# EAGLE board Pedometer_sch_v3 (EAGLE 9.6.2)
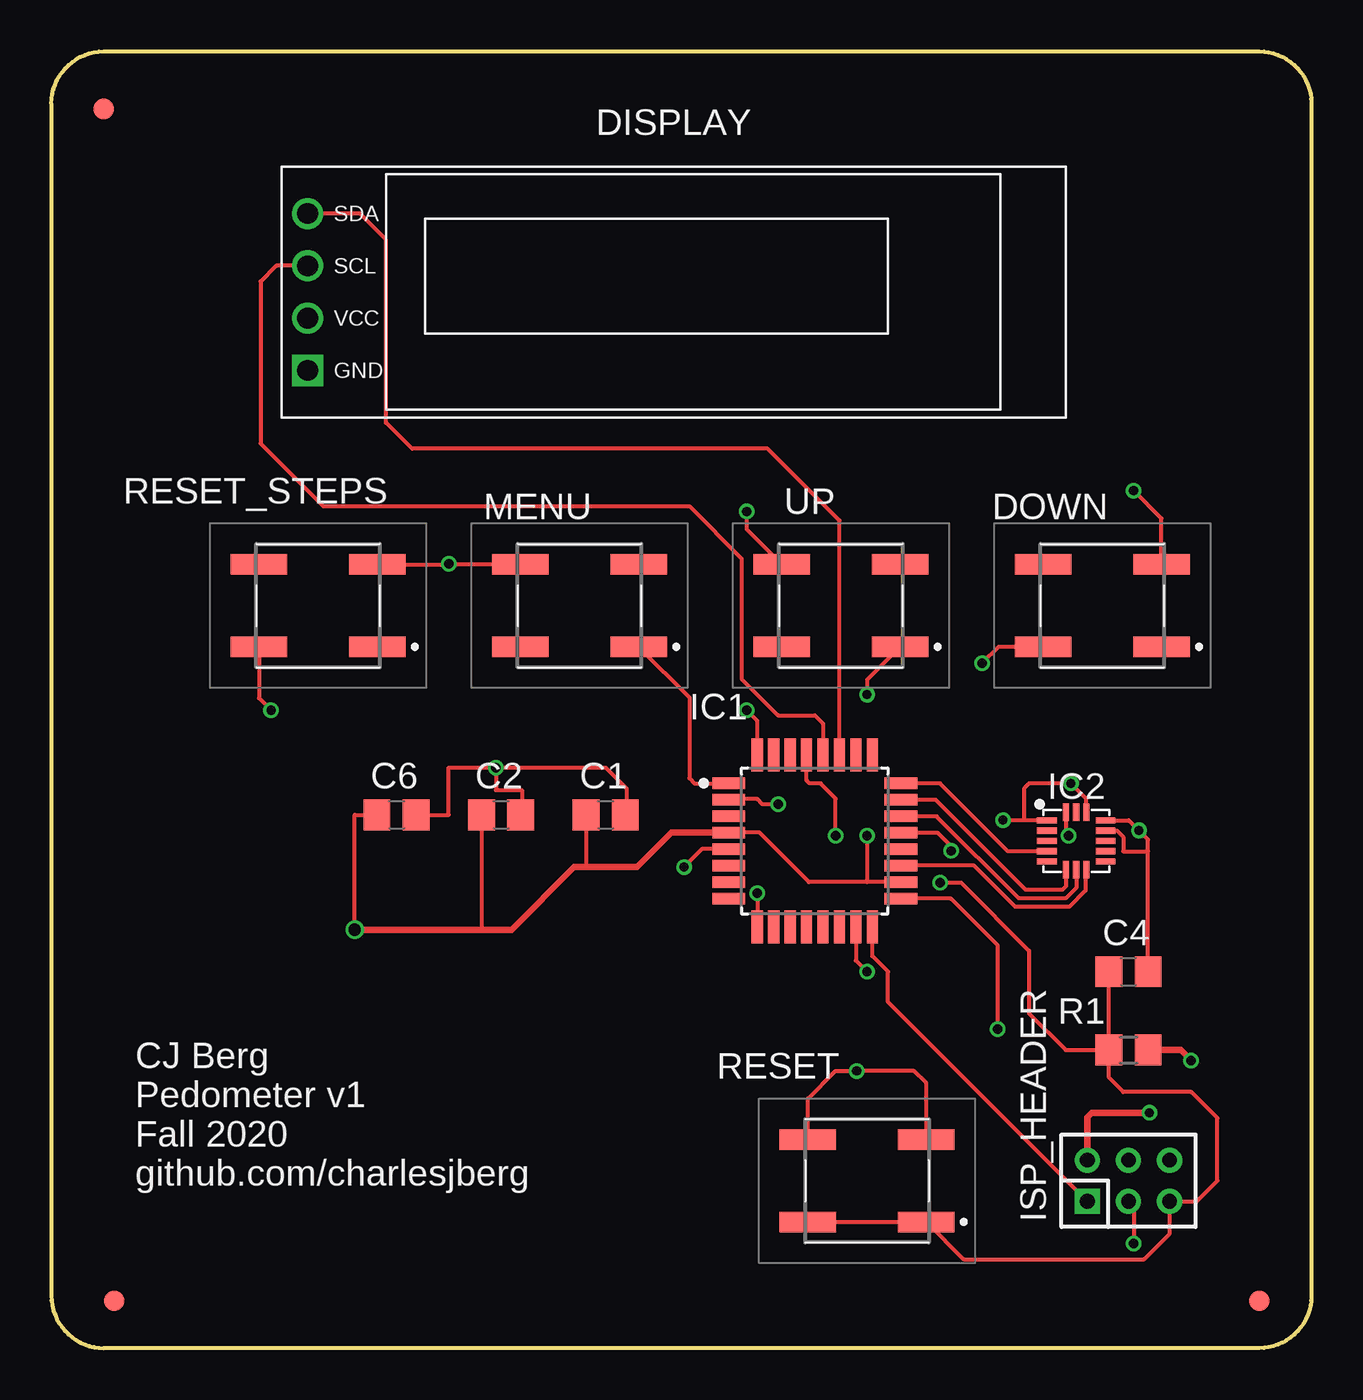
[diagram p0: board, top side]
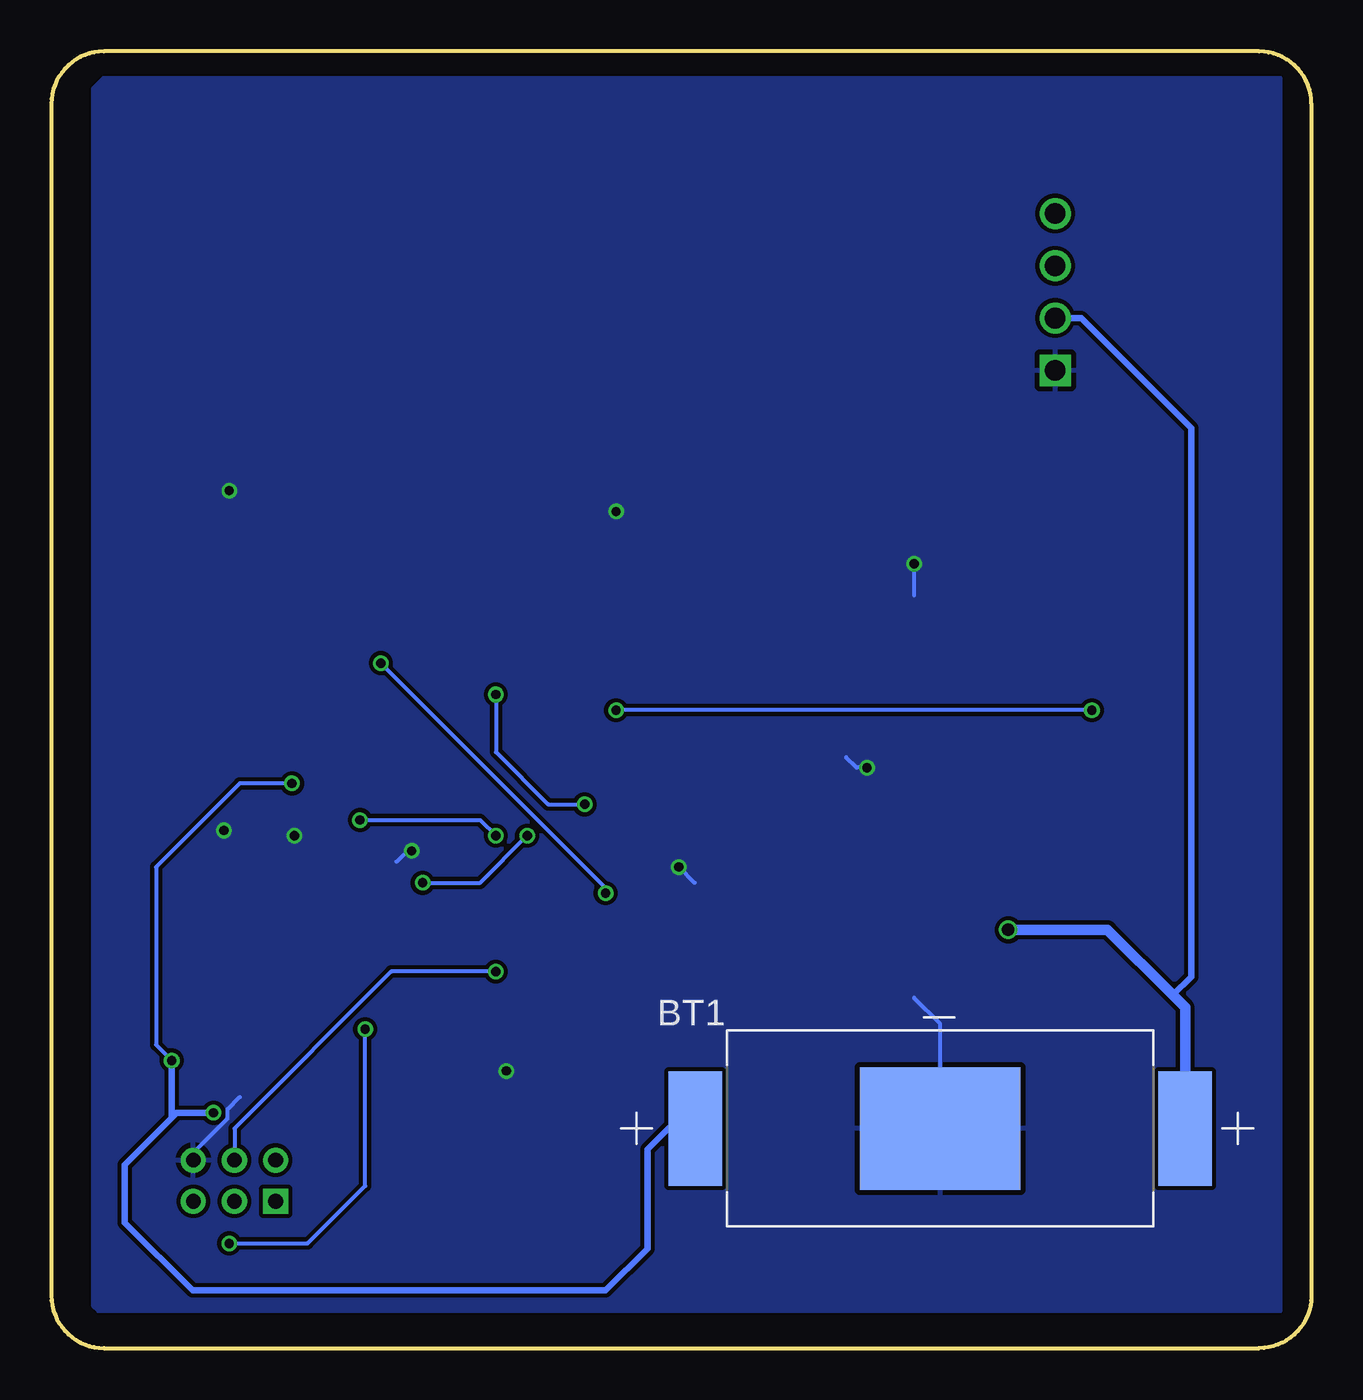
[diagram p1: board, bottom side, seen from below]

Size 61.21 x 62.99 mm. Coordinates in mm from the lower left corner, seen from the top.
Outline: 0,60.45 arc-90 2.54,62.99 58.67,62.99 arc-90 61.21,60.45 61.21,2.54 arc-90 58.67,0 2.54,0 arc-90 0,2.54 0,60.45
Copper layers (1*16): Top 0.035mm / dielectric 1.5mm / Bottom 0.035mm
Design rules "Dirty8TS": minimum track width 8mil, minimum drill 15mil, track to track 8mil, track to pad 8mil, pad to pad 8mil, via to via 8mil, smd to smd 0mil, copper to edge 10mil, drill to drill 10mil, minimum pad ring 10mil, minimum via ring 6mil, stop-mask expansion 2mil, vias tented up to drill 25mil, thermal gap 10mil

## Footprints (pad centres in the part's own frame; a part is rotated, then mirrored left to right if it is on the bottom)
BAT_BC-2003 = smd 7.8 x 5.96: - 0,0 | smd 2.6 x 5.56: S1+ -11.905,0; S2+ 11.905,0
C0805 = smd 1.3 x 1.5: 1 -0.95,0; 2 0.95,0
DISPLAY-OLED-128X32 = drill 1 square: 1 -17.78,-3.81 | drill 1: 2 -17.78,-1.27; 3 -17.78,1.27; 4 -17.78,3.81
EVPBFAC1A000 = smd 2.75 x 1: A1 2.875,-2; A2 -2.875,-2; B1 2.875,2; B2 -2.875,2
QFP80P900X900X120-32N = smd 1.6 x 0.55: 1 -4.18,2.8; 2 -4.18,2; 3 -4.18,1.2; 4 -4.18,0.4; 5 -4.18,-0.4; 6 -4.18,-1.2; 7 -4.18,-2; 8 -4.18,-2.8; 17 4.18,-2.8; 18 4.18,-2; 19 4.18,-1.2; 20 4.18,-0.4; 21 4.18,0.4; 22 4.18,1.2; 23 4.18,2; 24 4.18,2.8 | smd 0.55 x 1.6: 9 -2.8,-4.18; 10 -2,-4.18; 11 -1.2,-4.18; 12 -0.4,-4.18; 13 0.4,-4.18; 14 1.2,-4.18; 15 2,-4.18; 16 2.8,-4.18; 25 2.8,4.18; 26 2,4.18; 27 1.2,4.18; 28 0.4,4.18; 29 -0.4,4.18; 30 -1.2,4.18; 31 -2,4.18; 32 -2.8,4.18
LGA-16-3X2.5 = smd 0.952 x 0.3: P$1 -1.426,1; P$2 -1.426,0.5; P$3 -1.426,0; P$4 -1.426,-0.5; P$5 -1.426,-1; P$9 1.426,-1; P$10 1.426,-0.5; P$11 1.426,0; P$12 1.426,0.5; P$13 1.426,1 | smd 0.3 x 0.851: P$6 -0.5,-1.402; P$7 0,-1.402; P$8 0.5,-1.402; P$14 0.5,1.402; P$15 0,1.402; P$16 -0.5,1.402
DIL-2MM-2X03 = drill 0.711 square: 1 -2,-1 | drill 0.711: 2 -2,1; 3 0,-1; 4 0,1; 5 2,-1; 6 2,1
R0805 = smd 1.3 x 1.5: 1 -0.95,0; 2 0.95,0
FIDUCIAL_1MM = smd 1 x 1: 1 0,0

## Placement (x,y rotation side)
BT1  BC-2003  [BAT_BC-2003]  18.03,10.67 0 bottom
C1  0.1uF  [C0805]  26.92,25.91 0 top
C2  0.1uF  [C0805]  21.84,25.91 0 top
C4  0.1uF  [C0805]  52.32,18.29 0 top
C6  0.1uF  [C0805]  16.76,25.91 0 top
DISPLAY  DISPLAY-OLED-128X32  [DISPLAY-OLED-128X32]  30.23,51.31 0 top
DOWN  EVP-BFAC1A000  [EVPBFAC1A000]  51.05,36.07 0 top
IC1  ATMEGA328PB-AU  [QFP80P900X900X120-32N]  37.08,24.64 0 top
IC2  ADXL362  [LGA-16-3X2.5]  49.78,24.64 0 top
ISP_HEADER  M-2X03-DIL-2MM  [DIL-2MM-2X03]  52.32,8.13 0 top
MENU  EVP-BFAC1A000  [EVPBFAC1A000]  25.65,36.07 0 top
R1  4.7k  [R0805]  52.32,14.48 0 top
RESET  EVP-BFAC1A000  [EVPBFAC1A000]  39.62,8.13 0 top
RESET_STEPS  EVP-BFAC1A000  [EVPBFAC1A000]  12.95,36.07 0 top
U$1  FIDUCIAL  [FIDUCIAL_1MM]  58.67,2.29 0 top
U$2  FIDUCIAL  [FIDUCIAL_1MM]  2.54,60.2 0 top
U$3  FIDUCIAL  [FIDUCIAL_1MM]  3.05,2.29 0 top
UP  EVP-BFAC1A000  [EVPBFAC1A000]  38.35,36.07 0 top

## Library data of the parts
BT1 = BC-2003; AVAILABILITY: Unavailable; DESCRIPTION: Battery Retainer Coin, 20.0mm 1 Cell SMD (SMT) Tab; MF: MPD (Memory; MP: BC-2003-TR; PACKAGE: None; PRICE: None
C1 C2 C4 C6 = rcl; SPICEPREFIX: C
DISPLAY = diy-modules
DOWN MENU RESET RESET_STEPS UP = EVP-BFAC1A000; AVAILABILITY: Warning; DESCRIPTION: Tactile Switch SPST-NO Top Actuated Surface Mount; MF: Panasonic Electronic; MP: EVP-BFAC1A000; PACKAGE: None; PRICE: None; PURCHASE-URL: https://pricing.snapeda.com/search/part/EVP-BFAC1A000/?ref=eda
IC1 = ATMEGA328PB-AU; AVAILABILITY: Good; DESCRIPTION: 8-bit Microcontrollers - MCU ATMEGA328PB 20MHZ IND TEMP; MF: Microchip Technology / Atmel; MP: ATMEGA328PB-AU; PACKAGE: None; PRICE: None; PURCHASE-URL: https://pricing.snapeda.com/search/part/ATMEGA328PB-AU/?ref=eda
IC2 = ADXL362; AVAILABILITY: Bad; DESCRIPTION: Accelerometer X, Y, Z Axis ±2g, 4g, 8g 6.25Hz ~ 400Hz 16-LGA (3x3.25); MF: Analog Devices; MP: ADXL362; PACKAGE: LGA-16 Analog Devices; PRICE: None
ISP_HEADER = con-headers-jp
R1 = rcl; SPICEPREFIX: R
U$1-U$3 = ECE388

## Nets
DOWN: DOWN.A2 IC1.9
GND: BT1.- C1.2 C2.2 C4.2 C6.2 DISPLAY.1 DOWN.B1 IC1.5 IC1.21 IC2.P$12 IC2.P$13 IC2.P$16 ISP_HEADER.6 MENU.B2 RESET.B1 RESET.B2 RESET_STEPS.B1 UP.B2
MENU_INT: IC1.1 MENU.A1
MISO: IC1.16 ISP_HEADER.1
MOSI: IC1.15 ISP_HEADER.4
PC0: IC1.23 IC2.P$6
PC1: IC1.24 IC2.P$4
PE2: IC1.19 IC2.P$8
PE3: IC1.22 IC2.P$7
RESET: C4.1 IC1.29 ISP_HEADER.5 R1.1 RESET.A1 RESET.A2
RESET_STEPS: IC1.32 RESET_STEPS.A2
SCK: IC1.17 ISP_HEADER.3
SCL: DISPLAY.3 IC1.28
SDA: DISPLAY.4 IC1.27
UP: IC1.2 UP.A1
VCC: BT1.S1+ BT1.S2+ C1.1 C2.1 C6.1 DISPLAY.2 IC1.4 IC1.18 IC2.P$1 IC2.P$14 ISP_HEADER.2 R1.2

## Tracks (layer width: path | path; a pad name or v marks a point on that pad's centre or on a via)
DOWN  (via drill 0.45)
  Top 0.203: DOWN.A2 46.01,34.07 v45.21,33.27 | v34.29,22.1 IC1.9
  Bottom 0.203: v45.21,33.27 34.29,22.35 v34.29,22.1
GND  (via drill 0.45)
  Top 0.203: RESET_STEPS.B1 19.27,38.07 v19.3,38.1 19.34,38.07 MENU.B2 | v21.59,28.19 20.07,28.19 20,28.19 19.3,28.19 19.3,25.91 C6.2 | v21.59,28.19 21.59,27.11 22.86,27.11 22.86,25.97 C2.2 | IC1.5 31.6,24.24 v30.73,23.37 | IC2.P$13 52.34,25.64 v52.83,25.15 53.27,24.7 53.27,24.13 | IC2.P$12 51.77,25.14 52.07,24.84 52.07,24.13 53.27,24.13 | C4.2 53.27,24.13 | IC2.P$16 49.28,25.15 49.28,25.03 v49.41,24.89 | IC1.21 43.03,25.04 43.71,24.36 v43.71,24.16 | UP.B2 33.78,39.77 v33.78,40.64 | DOWN.B1 53.93,40.3 v52.58,41.66 | RESET.B2 36.75,12.11 38.1,13.46 v39.12,13.46 41.91,13.46 42.5,12.87 RESET.B1 | C1.2 27.94,25.97 27.94,27.18 26.92,28.19 v21.59,28.19
  Bottom 0.203: v19.3,38.1 19.3,36.58 | v21.59,28.19 22.1,28.19 22.61,28.7 | v30.73,23.37 29.97,22.61 | BT1.- 18.03,15.75 19.3,17.02 | 52.07,12.19 52.66,11.6 52.66,11.15 54.32,9.48 ISP_HEADER.6 | v49.41,24.89 49.28,24.89 | v43.71,24.16 43.92,24.16 44.45,23.62
  pour Bottom: 1.52,1.78 58.93,1.78 59.18,2.03 59.18,61.21 58.67,61.72 1.52,61.72
MENU_INT
  Top 0.203: MENU.A1 30.99,31.61 30.99,27.69 31.24,27.44 IC1.1
MISO
  Top 0.203: ISP_HEADER.1 40.64,16.81 40.64,18.29 39.88,19.05 IC1.16
MOSI  (via drill 0.45)
  Top 0.203: IC1.15 39.08,18.83 v39.62,18.29
  Bottom 0.203: ISP_HEADER.4 52.32,10.67 44.7,18.29 v39.62,18.29
PC0
  Top 0.203: IC2.P$6 49.28,22.43 49.12,22.26 47.34,22.26 42.96,26.64 IC1.23
PC1
  Top 0.203: IC2.P$4 46.47,24.14 43.17,27.44 IC1.24
PE2
  Top 0.203: IC2.P$8 50.24,23.19 50.24,22.23 49.44,21.44 46.82,21.44 44.82,23.44 IC1.19
PE3
  Top 0.203: IC2.P$7 49.78,22.35 49.28,21.84 46.99,21.84 43,25.84 IC1.22
RESET  (via drill 0.45)
  Top 0.203: R1.1 51.37,13.14 52.07,12.45 55.37,12.45 56.64,11.18 56.64,8.13 55.64,7.13 ISP_HEADER.5 54.32,5.56 53.09,4.32 44.31,4.32 RESET.A1 RESET.A2 | R1.1 C4.1 | v43.18,22.61 44.2,22.61 47.5,19.3 47.5,16.26 49.28,14.48 R1.1 | v38.1,24.89 38.1,26.7 37.36,27.43 36.83,27.43 36.68,27.58 IC1.29
  Bottom 0.203: v43.18,22.61 40.39,22.61 v38.1,24.89
RESET_STEPS  (via drill 0.45)
  Top 0.203: RESET_STEPS.A2 10.08,31.58 v10.67,30.99 | v33.78,30.99 34.28,30.49 IC1.32
  Bottom 0.203: v10.67,30.99 v33.78,30.99
SCK  (via drill 0.45)
  Top 0.203: ISP_HEADER.3 52.58,6.87 v52.58,5.08 | IC1.17 43.69,21.84 45.97,19.56 v45.97,15.49
  Bottom 0.203: v52.58,5.08 48.77,5.08 45.97,7.87 v45.97,15.49
SCL
  Top 0.203: DISPLAY.3 10.92,52.58 10.16,51.82 10.16,43.94 13.21,40.89 30.99,40.89 33.53,38.35 33.53,32.51 35.31,30.73 37.08,30.73 37.48,30.33 IC1.28
SDA
  Top 0.203: IC1.27 38.28,40.2 34.8,43.69 17.53,43.69 16.26,44.96 16.26,53.85 14.99,55.12 DISPLAY.4
UP  (via drill 0.45)
  Top 0.203: UP.A1 39.62,32.46 v39.62,31.75 | v35.31,26.42 34.54,26.42 34.29,26.67 32.94,26.67 IC1.2
  Bottom 0.203: v39.62,31.75 39.62,28.96 37.08,26.42 v35.31,26.42
VCC  (via drill 0.45, 0.6)
  Top 0.203: IC2.P$14 50.28,26.68 v49.53,27.43 47.5,27.43 47.24,27.18 47.24,25.64 | IC1.18 39.62,22.64 | 39.62,22.64 36.8,22.64 34.4,25.04 32.77,25.04 | 47.24,25.64 46.24,25.64 v46.23,25.65 | v39.62,24.89 39.62,22.64 | 20.83,20.32 20.89,20.39 C2.1 | 25.91,23.37 25.97,23.43 C1.1 | C6.1 14.73,25.91 v14.73,20.32 | IC2.P$1 47.24,25.64
  Top 0.305: v14.73,20.32 20.83,20.32 22.35,20.32 25.4,23.37 25.91,23.37 28.45,23.37 30.12,25.04 32.77,25.04 IC1.4 | ISP_HEADER.2 50.32,11.21 50.55,11.43 v53.34,11.43 | R1.2 54.86,14.48 v55.37,13.97
  Bottom 0.203: v49.53,27.43 52.07,27.43 56.13,23.37 56.13,14.73 v55.37,13.97 | v46.23,25.65 40.39,25.65 v39.62,24.89
  Bottom 0.305: DISPLAY.2 11.18,50.04 5.84,44.7 5.84,18.03 6.73,17.14 | v53.34,11.43 55.12,11.43 55.37,11.18 | 55.37,11.18 57.66,8.89 57.66,6.1 54.36,2.79 34.29,2.79 32.26,4.83 32.26,9.65 31.24,10.67 BT1.S1+ | v55.37,13.97 55.37,11.18
  Bottom 0.508: BT1.S2+ 6.13,16.54 6.73,17.14 9.91,20.32 v14.73,20.32

## Text on the board
_tsilk: CJ Berg / Pedometer v1 / Fall 2020 / github.com/charlesjberg